# EAGLE board M_D_ext_power (EAGLE 9.6.2)
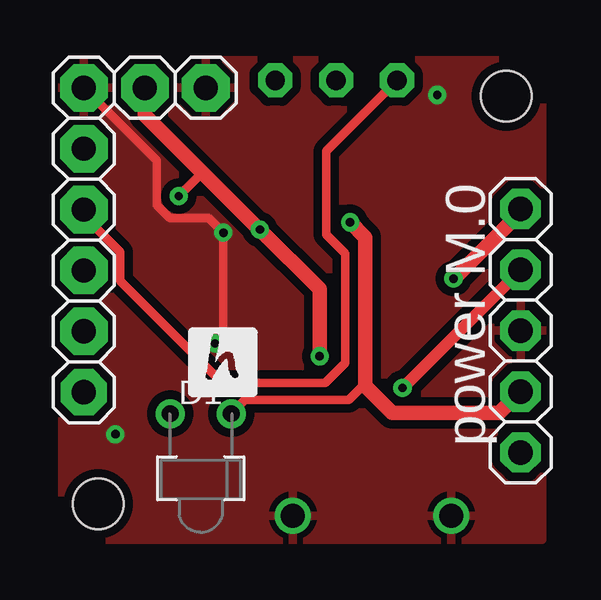
[diagram p0: board, top side]
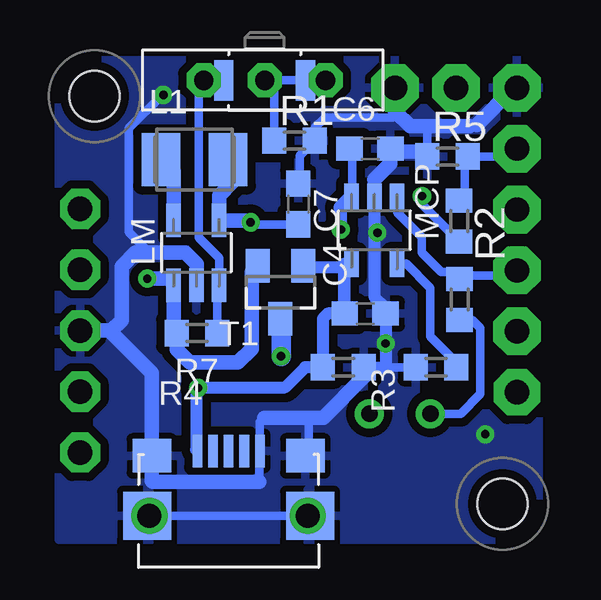
[diagram p1: board, bottom side, seen from below]

No outline drawn. Coordinates in mm, seen from the top.
Copper layers (1*16): Top 0.035mm / dielectric 1.5mm / Bottom 0.035mm
Design rules "default *": minimum track width 14mil, minimum drill 0.35mm, track to track 14mil, track to pad 6mil, pad to pad 6mil, via to via 14mil, smd to smd 14mil, copper to edge 15mil, drill to drill 15mil, minimum pad ring 10mil, minimum via ring 8mil, stop-mask expansion 4mil, vias tented up to drill 0mil, thermal gap 10mil
Holes 2.1 mm at 2,2 19,19

## Footprints (pad centres in the part's own frame; a part is rotated, then mirrored left to right if it is on the bottom)
C0603 = smd 1.1 x 1: 1 -0.85,0; 2 0.85,0
LED1.8 = drill 0.7: A -1.27,-0.4; K 1.27,-0.4
1X06 = drill 1.016 pad 1.93 octagon: 1 -6.35,0 | drill 1.016 pad 1.981 octagon: 2 -3.81,0; 3 -1.27,0; 4 1.27,0; 5 3.81,0; 6 6.35,0
1X05 = drill 1.016 pad 1.676 octagon: 1 -5.08,0; 2 -2.54,0; 3 0,0; 4 2.54,0; 5 5.08,0
L3230M = smd 1.6 x 2.2: 1 -1.4,0; 2 1.4,0
1X02 = drill 1.016 pad 1.981 octagon: 1 -1.27,0; 2 1.27,0
SOT32-5 = smd 0.6 x 1.4: BP 0.95,1.35; GND 0,-1.35; SHDN 0.95,-1.35; VIN -0.95,-1.35; VOUT -0.95,1.35
SOT23-5 = smd 0.6 x 1.1: 1 -0.95,-1.45; 2 0,-1.45; 3 0.95,-1.45; 4 0.95,1.35; 5 -0.95,1.35
SWITCH = drill 0.8 pad 1.422 octagon: P$1 -2.54,0; P$2 0,0; P$3 2.54,0 | smd 0.8 x 1.7: P$4 -1.7,0; P$5 1.7,0
R0603 = smd 1 x 1.1: 1 -0.85,0; 2 0.85,0
SOT23 = smd 1 x 1.4: D 0,1.1; G -0.95,-1.1; S 0.95,-1.1
MICRO-USB = smd 0.4 x 1.35: D+ 0,2.5; D- -0.65,2.5; GND 1.3,2.5; NC 0.65,2.5; VUSB -1.3,2.5 | smd 2 x 2: GND1 -3.4,-0.2; GND2 3.4,-0.2 | smd 1.6 x 1.4: GND3 -3.202,2.3; GND4 3.2,2.3 | drill 1: P$1 -3.3,-0.2; P$2 3.3,-0.2

## Placement (x,y rotation side)
C4  4u7  [C0603]  7.72,9.93 180 bottom
C6  4u7  [C0603]  7.52,16.81 180 bottom
C7  10u  [C0603]  10.52,14.5 270 bottom
D1  LED1.8  [LED1.8]  6.27,5.36 180 top
JP2  [1X06]  1.4,13 90 top
JP3  [1X05]  19.6,9.22 270 top
L1  2u2  [L3230M]  14.83,16.36 0 bottom
LIPOL  [1X02]  5.21,19.35 180 top
LM  TC  [SOT32-5]  14.76,12.47 0 bottom
MCP  MCP  [SOT23-5]  7.34,13.36 180 bottom
ON/OFF/RESET  SWITCH  [SWITCH]  11.91,19.66 0 bottom
R1  3k3  [R0603]  10.67,17.14 0 bottom
R2  100k  [R0603]  3.81,13.79 270 bottom
R3  22k  [R0603]  4.78,7.7 0 bottom
R4  100k  [R0603]  8.64,7.7 180 bottom
R5  100k  [R0603]  4.29,16.48 0 bottom
R6  3k3  [R0603]  3.78,10.52 270 bottom
R7  100k  [R0603]  14.73,9.12 0 bottom
T1  FDV  [SOT23]  11.25,10.82 180 bottom
USB  MICRO-USB  [MICRO-USB]  13.41,1.7 0 bottom

## Library data of the parts
C4 C6 C7 = rcl; SPICEPREFIX: C
D1 LM MCP T1 = !stavebnice03
JP2 JP3 LIPOL = pinhead2
L1 = rcl; SPICEPREFIX: L
ON/OFF/RESET USB = hugo
R1-R7 = rcl; SPICEPREFIX: R

## Nets
GND: C4.1 C6.1 C7.1 JP2.6 JP3.3 LIPOL.1 LM.GND MCP.2 R1.2 R3.1 R4.1 R5.1 USB.GND USB.GND1 USB.GND2 USB.GND3 USB.GND4 USB.P$1 USB.P$2
N$1: ON/OFF/RESET.P$2 ON/OFF/RESET.P$3 ON/OFF/RESET.P$5 R1.1
N$2: L1.1 LM.VOUT
N$3: D1.K R6.2
N$5: JP2.5 R2.1 R5.2
N$8: C6.2 LIPOL.2 MCP.3 R2.2 T1.D
N$9: C4.2 JP3.2 MCP.4 R4.2 T1.G USB.VUSB
N$11: MCP.5 R3.2
N$12: JP3.1 LM.VIN R7.1 T1.S
N$20: JP2.4 LM.SHDN ON/OFF/RESET.P$1 ON/OFF/RESET.P$4 R7.2
PA7: JP2.3 MCP.1 R6.1
VDD: C7.2 D1.A JP3.4 L1.2 LM.BP

## Tracks (layer width: path | path; a pad name or v marks a point on that pad's centre or on a via)
GND  (via drill 0.35)
  Top 0.356: JP2.6 4.45,16.3 4.45,14.46 4.98,13.92 6.6,13.92 v7.21,13.31 7.21,9.03 v6.87,8.69
  Bottom 0.356: v16.13,19.05 16.18,19.05 17.57,17.66 17.57,13.33 16.71,12.47 | 10.41,4.2 USB.GND4 10.11,3.9 10.08,3.93 10.08,5.59 | USB.P$2 | 16.61,1.7 USB.GND1 USB.GND2 | 12.14,2.92 12.14,4.17 USB.GND 12.11,5.42 11.94,5.59 | C7.1 10.45,15.35 10.45,16.51 R1.2 9.82,17.68 9.39,18.11 6.58,18.11 6.48,18.21 LIPOL.1 | R3.1 6.87,7.7 | 5.35,16.69 R5.1 5.14,17.51 4.91,17.75
  Bottom 0.508: C4.1 v6.87,8.69 6.87,7.7 R4.1 7.76,7.72 | C4.1 6.87,10.14 | USB.GND3 | MCP.2 7.34,13.49 7.21,13.36 v7.21,13.31 7.34,13.18 7.34,10.63 6.87,10.16 C4.1
  Bottom 0.559: MCP.2 7.34,15.52
  Bottom 0.61: 7.76,7.72 7.76,7.3 9.47,5.59 10.08,5.59 11.94,5.59 | 12.14,2.92 16.57,2.92 16.61,2.96 USB.GND3 16.61,7.45 18.38,9.22 JP3.3 18.3,9.22 17.87,9.65 17.87,11.9 17.3,12.47 16.71,12.47 15.21,12.47 14.74,12 14.74,11.12 | LIPOL.1 6.48,18.38 5.85,17.75 4.91,17.75 3.36,17.75 | JP2.6 1.53,19.35 3.08,17.8 | 7.34,15.52 6.67,16.19 C6.1 6.54,16.69 5.35,16.69
  other vias: 2.72,4.9
  pour Top (isolate 0.356): 0.5,20.5 0.5,0.5 20.5,0.5 20.5,20.5
  pour Bottom (isolate 0.356): 0.5,20.5 20.5,20.5 20.5,0.5 0.5,0.5
N$1
  Bottom 0.356: ON/OFF/RESET.P$3 ON/OFF/RESET.P$5 ON/OFF/RESET.P$2 11.52,19.27 R1.1
N$2
  Bottom 0.61: LM.VOUT 15.71,15.88 16.19,16.36 L1.1
N$3
  Bottom 0.356: 3.53,9.41 R6.2 3.25,9.67 2.92,9.34 2.92,6.58 3.74,5.76 D1.K
N$5
  Bottom 0.356: JP2.5 1.73,16.48 R5.2 3.57,16.36 3.57,14.88 R2.1
N$8  (via drill 0.35)
  Top 0.356: v5.36,14.83 6.33,15.81
  Top 0.61: v11.23,8.15 11.23,10.95 v8.74,13.44 8.71,13.44 6.33,15.81 3.94,18.2 LIPOL.2
  Bottom 0.356: 8.32,14.81 MCP.3 8.26,14.85 8.26,16.7 C6.2 | R2.2 5.36,14.49 v5.36,14.83
  Bottom 0.508: 8.74,14.36 v8.74,13.44
  Bottom 0.61: MCP.3 8.74,14.36
  Bottom 0.813: T1.D 11.23,9.7 v11.23,8.15
N$9  (via drill 0.35)
  Top 0.508: JP3.2 v14.68,6.84 v14.68,6.83
  Bottom 0.356: USB.VUSB 14.76,4.25
  Bottom 0.508: MCP.4 8.6,12.01 8.6,9.96 C4.2 | C4.2 8.62,9.98 8.62,11.87 10.3,11.87 T1.G | C4.2 9.28,9.93 9.49,9.73 R4.2 10.22,7.7 11.06,6.86 14.66,6.86 v14.68,6.83 14.76,6.75 14.76,4.25
N$11
  Bottom 0.356: MCP.5 6.02,12.01 5,11 5,8.98 3.92,7.9 R3.2
N$12  (via drill 0.35)
  Top 0.61: JP3.1 19.6,14.16 16.83,11.39 v16.8,11.39
  Bottom 0.61: T1.S 12.46,11.67 12.46,8.47 13.02,7.9 15.04,7.9 15.58,8.45 R7.1 15.71,9.24 LM.VIN 15.74,11.15 15.74,11.31 15.81,11.39 v16.8,11.39
N$20
  Top 0.356: ON/OFF/RESET.P$1 11.51,16.72 11.51,13.22 12.29,12.44 12.29,7.88 11.45,7.04 7.17,7.04 2.92,11.29 2.92,12.5 1.4,14.02 JP2.4
  Bottom 0.356: R7.2 13.88,11.05 LM.SHDN 13.81,12.26 14.66,13.11 14.66,19.45 ON/OFF/RESET.P$1 ON/OFF/RESET.P$4
PA7
  Bottom 0.356: 6.39,15.1 MCP.1 6.39,14.14 5.38,13.12 5.38,12.49 4.56,11.67 4.09,11.67 R6.1 3.79,11.52 1.61,11.52 JP2.3
VDD  (via drill 0.35)
  Top 0.356: 13.13,6.91 13.02,6.91 12.43,6.33 8.11,6.33 D1.A
  Top 0.61: v12.5,13.74 13.13,13.1 13.13,6.91 14.25,5.79 18.72,5.79 JP3.4
  Bottom 0.356: 12.98,15.69 13.26,15.41 | 13.26,15.98 13.43,15.98 | C7.2 12.5,13.65 v12.5,13.74
  Bottom 0.61: L1.2 13.43,15.98 | 13.26,15.98 13.26,15.41 13.81,14.86 LM.BP 12.57,13.82 v12.5,13.74

## Text on the board
tPlace: power M.0